# EAGLE board Legoduino2 (EAGLE 6.0), part 1 of 2
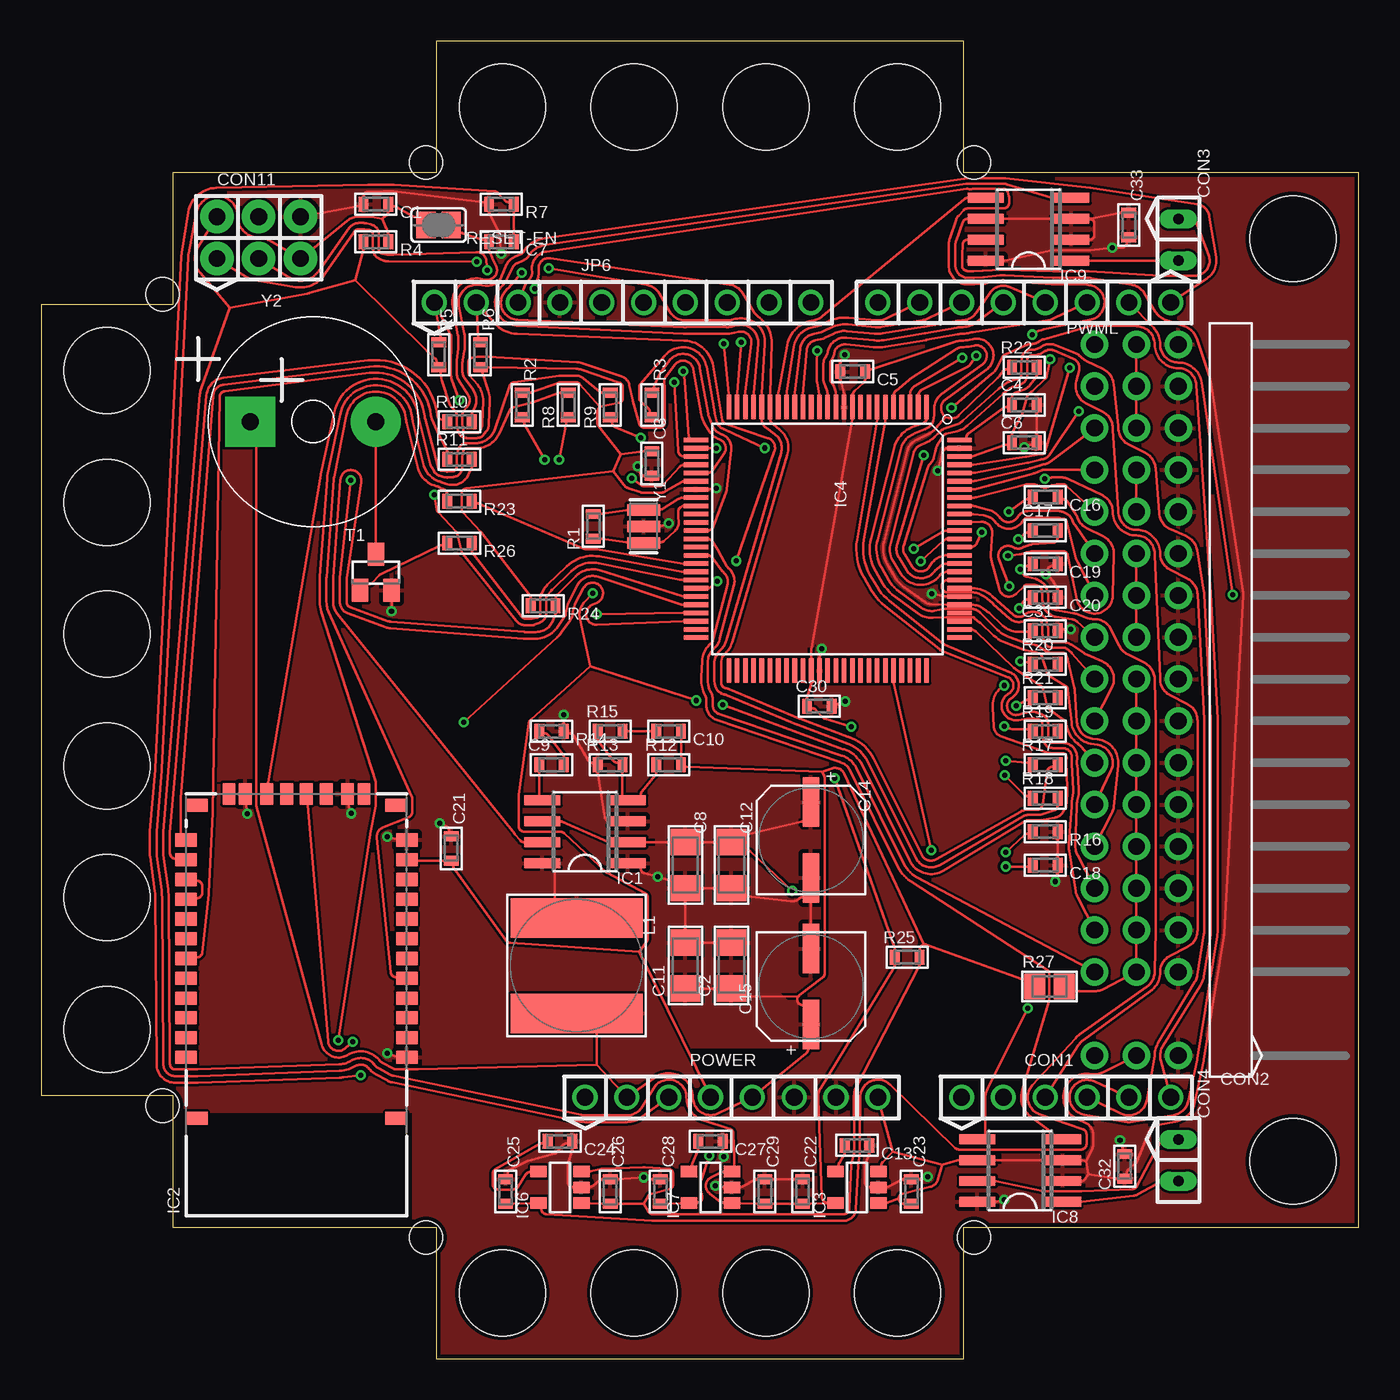
[diagram p0: board, top side]
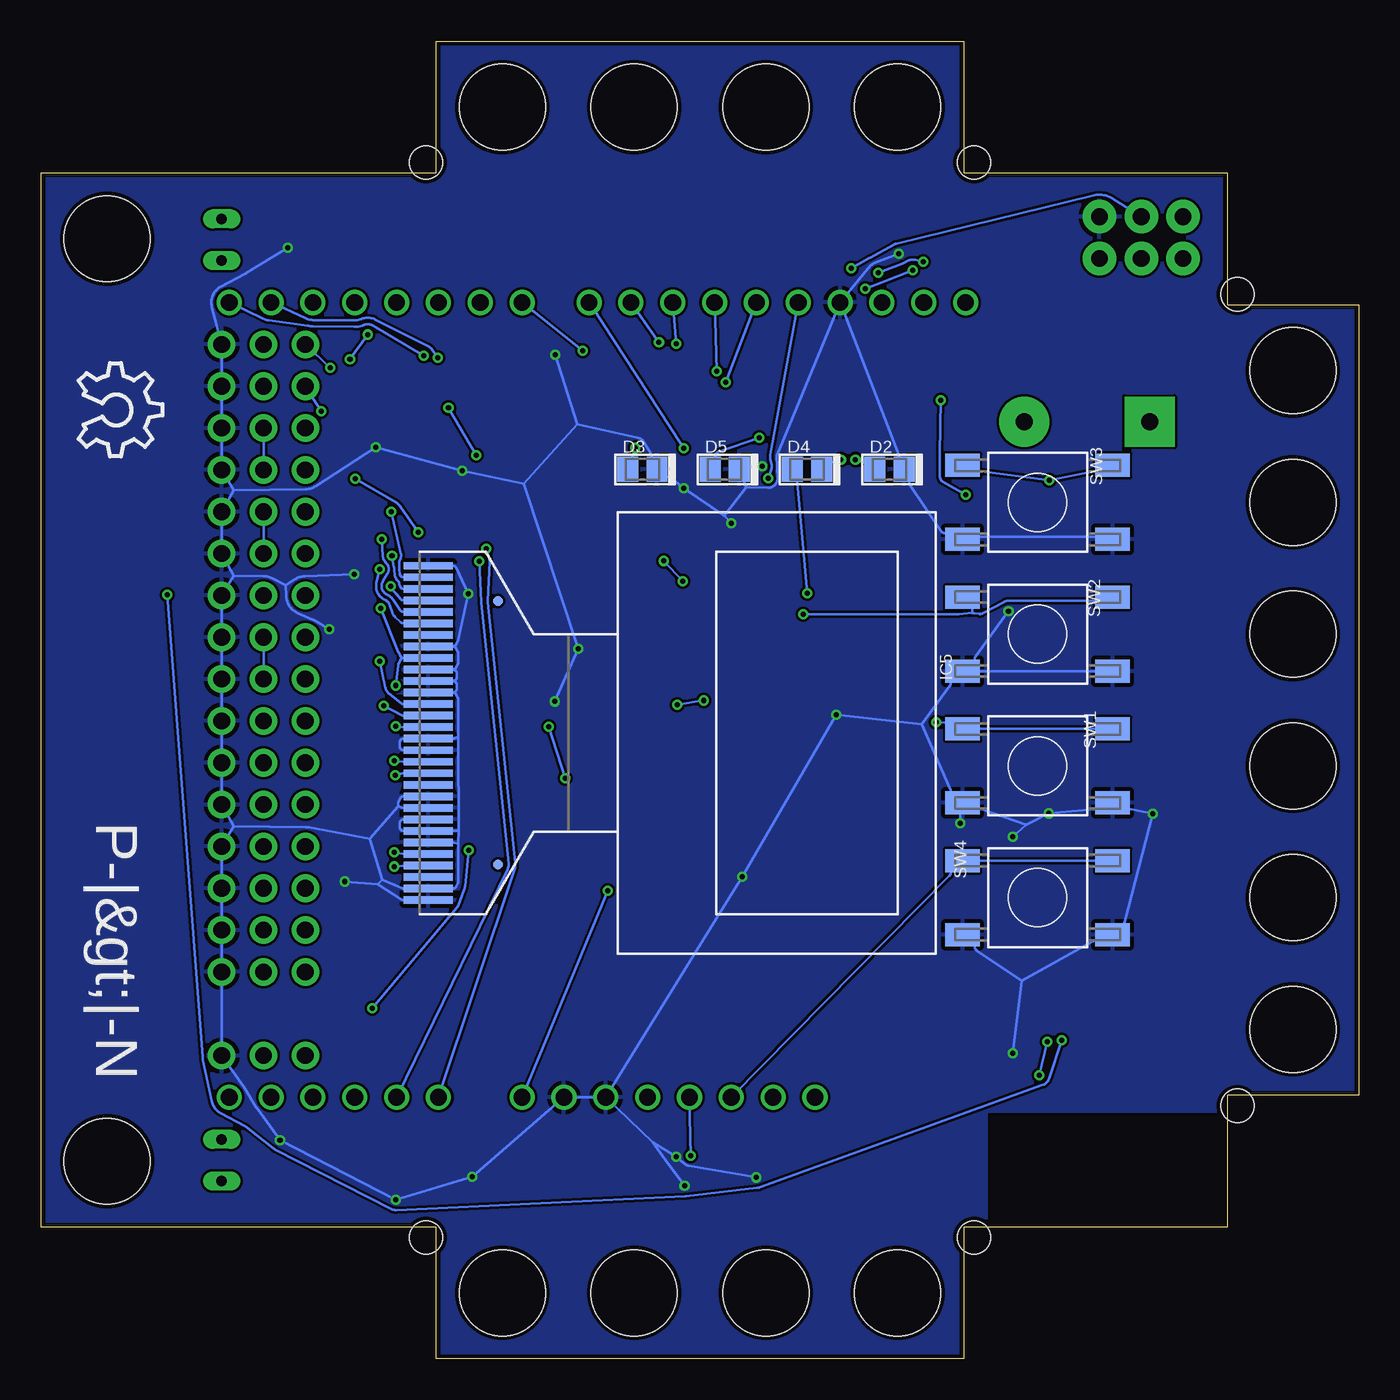
[diagram p1: board, bottom side, seen from below]

Size 80 x 80 mm. Coordinates in mm from the lower left corner, seen from the top.
Outline: 0,16 8,16 8,8 24,8 24,0 56,0 56,8 80,8 80,72 56,72 56,80 24,80 24,72 8,72 8,64 0,64 0,16
Copper layers 1+16: Top 0.035mm / dielectric 0.15mm / Bottom 0.035mm
Design rules: minimum track width 0.1524mm, track to track 0.1524mm, copper to edge 0.254mm, minimum pad ring 0.1mm, minimum via ring 0.1mm
Net classes: 0 default: width 0.152 mm, clearance 0.152 mm; 1 gnd: width 0.152 mm, clearance 0.152 mm to class 0, clearance 0.152 mm
Holes 2 mm at 7.37,64.64 23.36,72.64 56.63,72.64 56.63,7.37 23.36,7.37 7.37,15.37
Holes 5.2 mm at 28,4 36,4 44,4 52,4 4,20 4,28 4,36 4,44 4,52 4,60 28,76 36,76 44,76 52,76 76,68 76,12
tKeepout: area 24,0 to 56,8; area 24,72 to 56,80
bKeepout: area 24,72 to 56,80; area 24,0 to 56,8

## Footprints (pad centres in the part's own frame; a part is rotated, then mirrored left to right if it is on the bottom)
PN_default$ = smd 0.6 x 0.9: 1 -0.75,0; 2 0.75,0
PN_default$' = smd 1.6 x 1.8: 1 -1.4,0; 2 1.4,0
PN_default$'' = smd 3 x 1: + -2.3,0; - 2.3,0
pins$ = drill 1.016 pad 1.524: 1 -6.35,0; 2 -3.81,0; 3 -1.27,0; 4 1.27,0; 5 3.81,0; 6 6.35,0
PN_connector$ = drill 1.016 pad 1.676: 1 -21.59,-2.54; 2 -21.59,0; 3 -21.59,2.54; 4 -16.51,-2.54; 5 -16.51,0; 6 -16.51,2.54; 7 -13.97,-2.54; 8 -13.97,0; 9 -13.97,2.54; 10 -11.43,-2.54; 11 -11.43,0; 12 -11.43,2.54; 13 -8.89,-2.54; 14 -8.89,0; 15 -8.89,2.54; 16 -6.35,-2.54; 17 -6.35,0; 18 -6.35,2.54; 19 -3.81,-2.54; 20 -3.81,0; 21 -3.81,2.54; 22 -1.27,-2.54; 23 -1.27,0; 24 -1.27,2.54; 25 1.27,-2.54; 26 1.27,0; 27 1.27,2.54; 28 3.81,-2.54; 29 3.81,0; 30 3.81,2.54; 31 6.35,-2.54; 32 6.35,0; 33 6.35,2.54; 34 8.89,-2.54; 35 8.89,0; 36 8.89,2.54; 37 11.43,-2.54; 38 11.43,0; 39 11.43,2.54; 40 13.97,-2.54; 41 13.97,0; 42 13.97,2.54; 43 16.51,-2.54; 44 16.51,0; 45 16.51,2.54; 46 19.05,-2.54; 47 19.05,0; 48 19.05,2.54; 49 21.59,-2.54; 50 21.59,0; 51 21.59,2.54
pins$' = drill 0.635 pad 1.143 long: 1 -1.27,0; 2 1.27,0
Pietrucha$ = drill 1.016 pad 2.032: 1 -2.54,-1.27; 2 -2.54,1.27; 3 0,-1.27; 4 0,1.27; 5 2.54,-1.27; 6 2.54,1.27
PN_default$''' = smd 1.27 x 1.524: A -0.889,0; K 0.889,0
PN_IC$ = smd 0.6 x 2.2: 1 -1.905,-2.6; 2 -0.635,-2.6; 3 0.635,-2.6; 4 1.905,-2.6; 5 1.905,2.6; 6 0.635,2.6; 7 -0.635,2.6; 8 -1.905,2.6
PN_modules$ = smd 0.8 x 1.3: 1 -3.2,-6.7; 2 -2,-6.7; 3 -0.8,-6.7; 4 0.4,-6.7; 5 1.6,-6.7; 6 2.8,-6.7; 7 4,-6.7; 8 5.2,-6.7; 9 6.4,-6.7; 10 7.6,-6.7; 11 8.8,-6.7; 12 10,-6.7; 13 10,6.7; 14 8.8,6.7; 15 7.6,6.7; 16 6.4,6.7; 17 5.2,6.7; 18 4,6.7; 19 2.8,6.7; 20 1.6,6.7; 21 0.4,6.7; 22 -0.8,6.7; 23 -2,6.7; 24 -3.2,6.7; P$1 12.1,6.05; P$10 12.1,-6.05; P$35 -6.9,-6.05; P$36 -6.9,6.05 | smd 1.3 x 0.78: 28 12.8,3.1; 29 12.8,-3.1; 30 12.8,4.1; 35 12.8,-4.1 | smd 1.3 x 0.8: 31 12.8,1.8; 32 12.8,0.6; 33 12.8,-0.6; 34 12.8,-1.8
PN_IC$' = smd 0.7 x 1: 1 -0.95,-1.3; 2 0,-1.3; 3 0.95,-1.3; 4 0.95,1.3; 5 -0.95,1.3
PN_microcontrollers$ = smd 1.5 x 0.28: 1 -8,6; 2 -8,5.5; 3 -8,5; 4 -8,4.5; 5 -8,4; 6 -8,3.5; 7 -8,3; 8 -8,2.5; 9 -8,2; 10 -8,1.5; 11 -8,1; 12 -8,0.5; 13 -8,0; 14 -8,-0.5; 15 -8,-1; 16 -8,-1.5; 17 -8,-2; 18 -8,-2.5; 19 -8,-3; 20 -8,-3.5; 21 -8,-4; 22 -8,-4.5; 23 -8,-5; 24 -8,-5.5; 25 -8,-6; 51 8,-6; 52 8,-5.5; 53 8,-5; 54 8,-4.5; 55 8,-4; 56 8,-3.5; 57 8,-3; 58 8,-2.5; 59 8,-2; 60 8,-1.5; 61 8,-1; 62 8,-0.5; 63 8,0; 64 8,0.5; 65 8,1; 66 8,1.5; 67 8,2; 68 8,2.5; 69 8,3; 70 8,3.5; 71 8,4; 72 8,4.5; 73 8,5; 74 8,5.5; 75 8,6 | smd 0.28 x 1.5: 26 -6,-8; 27 -5.5,-8; 28 -5,-8; 29 -4.5,-8; 30 -4,-8; 31 -3.5,-8; 32 -3,-8; 33 -2.5,-8; 34 -2,-8; 35 -1.5,-8; 36 -1,-8; 37 -0.5,-8; 38 0,-8; 39 0.5,-8; 40 1,-8; 41 1.5,-8; 42 2,-8; 43 2.5,-8; 44 3,-8; 45 3.5,-8; 46 4,-8; 47 4.5,-8; 48 5,-8; 49 5.5,-8; 50 6,-8; 76 6,8; 77 5.5,8; 78 5,8; 79 4.5,8; 80 4,8; 81 3.5,8; 82 3,8; 83 2.5,8; 84 2,8; 85 1.5,8; 86 1,8; 87 0.5,8; 88 0,8; 89 -0.5,8; 90 -1,8; 91 -1.5,8; 92 -2,8; 93 -2.5,8; 94 -3,8; 95 -3.5,8; 96 -4,8; 97 -4.5,8; 98 -5,8; 99 -5.5,8; 100 -6,8
PN_opto$ = smd 0.45 x 3: 1 -10.15,-23; 2 -9.45,-23; 3 -8.75,-23; 4 -8.05,-23; 5 -7.35,-23; 6 -6.65,-23; 7 -5.95,-23; 8 -5.25,-23; 9 -4.55,-23; 10 -3.85,-23; 11 -3.15,-23; 12 -2.45,-23; 13 -1.75,-23; 14 -1.05,-23; 15 -0.35,-23; 16 0.35,-23; 17 1.05,-23; 18 1.75,-23; 19 2.45,-23; 20 3.15,-23; 21 3.85,-23; 22 4.55,-23; 23 5.25,-23; 24 5.95,-23; 25 6.65,-23; 26 7.35,-23; 27 8.05,-23; 28 8.75,-23; 29 9.45,-23; 30 10.15,-23 | smd 0.6 x 0.6: ALIGN1 -8,-18.75; ALIGN2 8,-18.75
pins$'' = drill 1.016 pad 1.524: 1 -11.43,0; 2 -8.89,0; 3 -6.35,0; 4 -3.81,0; 5 -1.27,0; 6 1.27,0; 7 3.81,0; 8 6.35,0; 9 8.89,0; 10 11.43,0
PN_inductor$ = smd 2.4 x 8: 1 -2.9,0; 2 2.9,0
pins$''' = drill 1.016 pad 1.524: 1 -8.89,0; 2 -6.35,0; 3 -3.81,0; 4 -1.27,0; 5 1.27,0; 6 3.81,0; 7 6.35,0; 8 8.89,0
PN_default$'''' = smd 1.27 x 1.524: 1 -0.889,0; 2 0.889,0
jumper$ = smd 1.168 x 1.6: 1 -0.762,0; 2 0.762,0
PN_default$''''' = smd 1.4 x 2.1: 1 -2.25,-4.55; 1A -2.25,4.55; 2 2.25,-4.55; 2A 2.25,4.55
PN_default$'''''' = smd 1 x 1.4: 1 -0.95,-1.1; 2 0.95,-1.1; 3 0,1.1
SmartPrj$ = smd 0.7 x 2: 1 -1,0; 2 0,0; 3 1,0
Pietrucha$' = drill 1.016 pad 3.048 square: + -3.81,0 | drill 1.016 pad 3.048: - 3.81,0

## Placement (x,y rotation side)
C1  22p  [PN_default$]  20.32,70.1 180 top
C2  22u  [PN_default$']  41.91,23.88 90 top
C3  100n  [PN_default$]  37.08,54.36 270 top
C4  100n  [PN_default$]  59.69,57.91 0 top
C5  100n  [PN_default$]  49.28,59.94 180 top
C6  100n  [PN_default$]  59.69,55.63 0 top
C7  100n  [PN_default$]  27.94,67.82 180 top
C8  22u  [PN_default$']  39.12,29.97 270 top
C9  3n9  [PN_default$]  30.99,36.07 0 top
C10  150p  [PN_default$]  38.1,38.1 180 top
C11  22u  [PN_default$']  39.12,23.88 90 top
C12  22u  [PN_default$']  41.91,29.97 270 top
C13  470p  [PN_default$]  49.53,12.95 180 top
C14  100u/25V  [PN_default$'']  46.74,31.5 270 top
C15  100u/25V  [PN_default$'']  46.74,22.61 90 top
C16  *  [PN_default$]  60.96,52.32 180 top
C17  *  [PN_default$]  60.96,50.29 0 top
C18  *  [PN_default$]  60.96,29.97 180 top
C19  *  [PN_default$]  60.96,48.26 180 top
C20  *  [PN_default$]  60.96,46.23 180 top
C21  100n  [PN_default$]  24.89,30.99 270 top
C22  2u2  [PN_default$]  46.23,10.16 270 top
C23  1u  [PN_default$]  52.83,10.16 270 top
C24  470p  [PN_default$]  31.5,13.21 180 top
C25  2u2  [PN_default$]  28.19,10.16 270 top
C26  1u  [PN_default$]  34.54,10.16 270 top
C27  470p  [PN_default$]  40.64,13.21 180 top
C28  2u2  [PN_default$]  37.59,10.16 270 top
C29  1u  [PN_default$]  43.94,10.16 270 top
C30  100n  [PN_default$]  47.24,39.62 0 top
C31  100n  [PN_default$]  60.96,44.2 0 top
C32  100n  [PN_default$]  65.79,11.68 90 top
C33  100n  [PN_default$]  66.04,68.83 270 top
CON1  [pins$]  62.23,15.88 0 top
CON2  [PN_connector$]  66.5,40 90 top
CON3  [pins$']  69.04,67.94 270 top
CON4  [pins$']  69.04,12.06 270 top
CON11  ISP-AVR  [Pietrucha$]  13.21,68.07 0 top
D2  PWR  [PN_default$''']  28.5,54 0 bottom
D3  LED  [PN_default$''']  43.5,54 0 bottom
D4  DATA  [PN_default$''']  33.5,54 0 bottom
D5  CONN  [PN_default$''']  38.5,54 0 bottom
IC1  NCP3170ADR2G  [PN_IC$]  33.02,32 90 top
IC2  RN-42  [PN_modules$]  15.5,21.5 90 top
IC3  MIC5205-5.0YM5  [PN_IC$']  49.53,10.41 90 top
IC4  ATMEGA2560-16AU  [PN_microcontrollers$]  47.75,49.78 270 top
IC5  UG-2864HSWEG01_SPI  [PN_opto$]  33.5,38 270 bottom
IC6  MIC5205-3.6YM5  [PN_IC$']  31.5,10.41 90 top
IC7  MIC5205-3.3YM5  [PN_IC$']  40.64,10.41 90 top
IC8  BD6221F-E2  [PN_IC$]  59.44,11.43 90 top
IC9  BD6221F-E2  [PN_IC$]  59.94,68.58 90 top
JP6  [pins$'']  35.31,64.14 0 top
L1  SRN8040-100M  [PN_inductor$]  32.51,23.88 270 top
LOGO1  [ohw-logo$]  77.72,60.45 270 bottom
POWER  [pins$''']  41.91,15.88 0 top
PWML  [pins$''']  59.69,64.14 180 top
R1  1M  [PN_default$]  33.53,50.55 90 top
R2  1k  [PN_default$]  29.21,57.91 270 top
R3  1k  [PN_default$]  37.08,57.91 270 top
R4  10k  [PN_default$]  20.32,67.82 180 top
R5  10k  [PN_default$]  24.13,60.96 270 top
R6  10k  [PN_default$]  26.67,60.96 270 top
R7  1k  [PN_default$]  27.94,70.1 180 top
R8  1k  [PN_default$]  32,57.91 90 top
R9  1k  [PN_default$]  34.54,57.91 90 top
R10  10k  [PN_default$]  25.4,56.9 0 top
R11  10k  [PN_default$]  25.4,54.61 0 top
R12  24k9  [PN_default$]  38.1,36.07 0 top
R13  4k75  [PN_default$]  34.54,36.07 0 top
R14  10k  [PN_default$]  30.99,38.1 180 top
R15  1k  [PN_default$]  34.54,38.1 0 top
R16  390k  [PN_default$]  60.96,32 180 top
R17  10k  [PN_default$]  60.96,36.07 0 top
R18  10k  [PN_default$]  60.96,34.04 0 top
R19  10k  [PN_default$]  60.96,38.1 0 top
R20  10k  [PN_default$]  60.96,42.16 0 top
R21  10k  [PN_default$]  60.96,40.13 0 top
R22  0R  [PN_default$]  59.69,60.2 0 top
R23  10k  [PN_default$]  25.4,52.07 180 top
R24  100k  [PN_default$]  30.48,45.72 180 top
R25  N.C.  [PN_default$]  52.58,24.38 0 top
R26  10k  [PN_default$]  25.4,49.53 180 top
R27  0R  [PN_default$'''']  61.21,22.61 0 top
RESET-EN  [jumper$]  24.13,68.83 180 top
SW1  [PN_default$''''']  19.5,36 270 bottom
SW2  [PN_default$''''']  19.5,44 270 bottom
SW3  [PN_default$''''']  19.5,52 270 bottom
SW4  RST  [PN_default$''''']  19.5,28 270 bottom
T1  [PN_default$'''''']  20.32,47.75 0 top
Y1  [SmartPrj$]  36.58,50.55 270 top
Y2  [Pietrucha$']  16.51,56.9 0 top

## Library data of the parts
C1 C3-C7 C9 C10 C13 C16-C33 R1-R26 = $0603
C2 C8 C11 C12 = $1206
C14 C15 = $CE_SMD6.3
CON1 = $PIN6X1C
CON2 = $PIN(1+16)X3_DS
CON3 CON4 = $PIN2X1B
CON11 = $PIN3X2
D2-D5 = $D0805
IC1 IC8 IC9 = $SO08
IC2 = $RN42
IC3 IC6 IC7 = $SOT23-5
IC4 = $TQFP100
IC5 = $UG-2864HSWEG01
JP6 = $PIN10X1C
L1 = $SRN8040
LOGO1 = $OSHW_10X200_NOTEXT
POWER PWML = $PIN8X1C
R27 = $0805
RESET-EN = $SJ
SW1-SW4 = $MICROSW_SMD
T1 = $SOT23
Y1 = $RESONATOR
Y2 = $BUZZER-HCM

## Nets
0: IC4.2 PWML.1 R10.2
1: IC4.3 PWML.2 R11.2
2: IC4.12 PWML.3
3: IC4.16 PWML.4
4: IC4.13 PWML.5
5: IC4.17 PWML.6
6: IC4.18 PWML.7
7: IC4.14 PWML.8
8: IC4.27 JP6.10
9: IC4.24 JP6.9
10: IC4.25 JP6.8
11: IC4.26 JP6.7
12: IC4.28 JP6.6
13: IC4.29 JP6.5
18: IC4.46 SW3.1 SW3.1A
19: IC1.7 IC4.45 R24.1
20: IC4.44 JP6.2 R6.1
21: IC4.43 JP6.1 R5.1
22: IC4.78
23: CON2.21 IC4.77
24: CON2.18 IC4.1
25: CON2.15 IC4.5
26: CON2.12 IC4.6
27: CON2.9 IC4.7
28: CON2.6 IC4.38
29: IC4.71 IC8.5
38: IC4.37 R3.1
42: IC4.42 R26.1
43: IC4.41 R23.1
44: IC4.40 IC8.4
46: IC4.23 IC9.4
50: CON11.1 IC4.22
51: CON11.4 IC4.21 R18.2
52: CON11.3 IC4.20 R17.2
70: R19.2
71: IC4.19 IC9.5
72: R20.2
73: R21.2
74: IC4.47 SW2.1 SW2.1A
75: IC4.48 SW1.1 SW1.1A
+3V3: C20.2 C21.2 C28.2 D4.A IC2.11 IC5.9 IC7.5 POWER.4
+3V6: C19.2 C25.2 IC5.6 IC6.5
+5V: C3.1 C5.1 C22.2 C29.2 C30.1 C31.1 CON11.2 IC3.5 IC4.10 IC4.31 IC4.61 IC4.80 IC7.1 IC7.3 R2.1 R4.2 R5.2 R6.2 R22.1 R24.2 R25.1
+5VP: C2.1 C10.1 C11.1 C15.+ C26.2 IC6.1 IC6.3 L1.2 POWER.2 POWER.5 R12.2 R25.2 R27.1 Y2.+
+5VP_O: CON2.5 CON2.8 CON2.11 CON2.14 CON2.17 CON2.20 CON2.23 CON2.26 CON2.29 CON2.32 CON2.35 CON2.38 CON2.41 CON2.44 CON2.47 CON2.50 R27.2
ADC0: CON1.1 IC4.89
ADC1: CON1.2 IC4.88
ADC2: CON1.3 IC4.87
ADC3: CON1.4 IC4.86
ADC4: CON1.5 IC4.85
ADC5: CON1.6 IC4.84
ADC6: CON2.27 IC4.83
ADC7: CON2.24 IC4.82
ADC8: CON2.51 IC4.97
ADC9: CON2.48 IC4.96
ADC10: CON2.45 IC4.95
ADC11: CON2.42 IC4.94
ADC12: CON2.39 IC4.93
ADC13: CON2.36 IC4.92
ADC14: CON2.33 IC4.91
ADC15: CON2.30 IC4.90
AREF: C6.1 IC4.98 JP6.3
AVCC: C4.1 IC4.100 R22.2
DTR: C7.1 IC2.33 R7.1
GND [gnd]: C1.2 C2.2 C3.2 C4.2 C5.2 C6.2 C8.2 C11.2 C12.2 C13.1 C14.- C15.- C18.1 C19.1 C20.1 C21.1 C22.1 C23.1 C24.1 C25.1 C26.1 C27.1 C28.1 C29.1 C30.2 C31.2 C32.2 C33.2 CON2.1 CON2.4 CON2.7 CON2.10 CON2.13 CON2.16 CON2.19 CON2.22 CON2.25 CON2.28 CON2.31 CON2.34 CON2.37 CON2.40 CON2.43 CON2.46 CON2.49 CON11.6 D2.K D3.K D5.K IC1.1 IC1.3 IC2.1 IC2.12 IC2.28 IC2.29 IC3.2 IC4.11 IC4.32 IC4.62 IC4.81 IC4.99 IC5.1 IC5.8 IC5.10 IC5.11 IC5.12 IC5.16 IC5.17 IC5.21 IC5.22 IC5.23 IC5.24 IC5.25 IC5.29 IC5.30 IC6.2 IC7.2 IC8.8 IC9.8 JP6.4 POWER.6 POWER.7 R7.2 R13.1 R14.1 R16.1 SW1.2 SW1.2A SW2.2 SW2.2A SW3.2 SW3.2A SW4.2 SW4.2A T1.2 Y1.2
GND1: IC1.4 R12.1 R13.2 R15.1
N$1: IC2.14 R10.1
N$2: D3.A R3.2
N$3: D2.A R2.2
N$4: IC2.13 R11.1
N$5: IC2.31 R8.2
N$6: D4.K R8.1
N$7: D5.A R9.1
N$8: IC2.19 R9.2
N$9: C18.2 IC5.27
N$10: C9.1 IC1.5
N$11: C9.2 R14.2
N$12: IC5.26 R16.2
N$13: C10.2 R15.2
N$14: C16.1 IC5.3
N$15: C17.2 IC5.4
N$16: C16.2 IC5.2
N$17: C17.1 IC5.5
N$18: IC5.13 R20.1
N$19: IC5.15 R19.1
N$20: IC5.18 R17.1
N$21: IC5.19 R18.1
N$22: IC2.15 IC2.16
N$23: IC5.14 R21.1
N$24: C13.2 IC3.4
N$25: T1.3 Y2.-
N$26: R26.2 T1.1
N$27: IC2.5 R23.2
N$28: C24.2 IC6.4
N$29: CON3.2 IC9.1
N$30: CON4.2 IC8.1
N$31: C27.2 IC7.4
N$32: CON3.1 IC9.7
N$33: CON4.1 IC8.7
OC_PWM1: IC4.15
OC_PWM2: IC4.39
RESET: C1.1 C7.2 CON11.5 IC4.30 POWER.3 R4.1 RESET-EN.1 RESET-EN.2 SW4.1 SW4.1A
SW: IC1.8 L1.1
VCC: IC5.28
VIN: C8.1 C12.1 C14.+ C23.2 C32.1 C33.1 CON2.2 IC1.2 IC1.6 IC3.1 IC3.3 IC8.2 IC8.3 IC8.6 IC9.2 IC9.3 IC9.6 POWER.8
XTAL1: IC4.34 R1.1 Y1.3
XTAL2: IC4.33 R1.2 Y1.1

## Tracks (layer width: path | path; a pad name or v marks a point on that pad's centre or on a via)
0  (via drill 0.3 pad 0.61)
  Top 0.152: IC4.2 53.25,58.46 53.25,58.53 arc-30 53.27,58.6 53.33,58.7 arc-33 53.46,58.83 56.21,60.21 arc28 56.44,60.41 v56.78,60.9 | R10.2 26.15,57.27 26.15,57.35 arc-26 26.18,57.48 26.32,57.75 arc62 26.22,58.83 25.7,59.53 arc-36 25.58,59.91 25.58,60.51 arc-11 25.59,60.63 25.7,61.2 arc10 25.72,61.39 25.72,61.69 arc1 25.72,61.71 25.72,62.01 arc11 25.7,62.23 25.36,63.92 arc-107 26.52,65.2 27,65.16 arc74 27.97,65.75 28.2,66.33 arc-45 28.75,66.9 29.12,67.07 arc34 29.27,67.19 29.27,67.2 arc-49 30.57,68.03 56.03,71.65 arc-8 56.24,71.67 58.44,71.67 arc-6 58.54,71.66 63.68,71.11 arc-3 63.7,71.11 70.18,70.1 arc-72 70.93,69.35 71.33,66.88 arc-66 70.76,65.58 PWML.1
  Bottom 0.152: v56.78,60.9 59.85,62.73 arc-53 60.4,62.77 60.41,62.77 arc23 60.98,62.66 63.52,62.69 arc9 63.75,62.71 63.76,62.71 arc-2 63.8,62.72 66.19,63.05 arc18 66.51,63.15 PWML.1
1  (via drill 0.3 pad 0.61)
  Top 0.152: v72.35,46.38 70.46,59.26 arc82 69.04,60.49 arc-90 67.94,61.59 arc44 67.53,62.59 PWML.2 | IC4.3 52.75,58.46 52.75,58.53 arc-59 53.06,59.08 v55.92,60.78 | R11.2 26.15,54.24 26.15,54.16 arc-26 26.12,54.03 25.94,53.67 arc-84 24.57,53.12 24.3,53.22 arc-4 24.23,53.25 arc9 24.11,53.3 arc-26 23.75,53.49 23.58,53.64 arc-34 23.24,54.21 22.57,56.9 arc-7 22.52,57.13 22.52,57.15 arc162 18.15,57.34 17.38,53.62 arc7 17.36,53.44 16.92,47.49 arc4 16.91,47.35 16.91,45.95 arc18 17.01,45.36 20.3,35.05 arc-18 20.32,34.95 20.32,33.65 arc-11 20.31,33.59 19.99,31.89 arc2 19.98,31.85 v18.05,19.33
  Bottom 0.152: v18.05,19.33 18.8,17.03 arc52 19.18,16.63 36.37,10.41 arc13 36.52,10.38 40.87,9.87 arc4 40.91,9.87 58.45,9.04 arc30 58.77,9.11 65.79,12.71 arc11 65.9,12.77 67.48,14.04 arc-11 67.62,14.13 69.09,14.91 arc50 69.65,15.65 70.18,18.17 arc8 70.2,18.32 v72.35,46.38 | v55.92,60.78 56.26,61.27 arc-28 56.49,61.47 59.71,63.1 arc-49 60.55,63.13 60.56,63.13 arc22 60.97,63.05 63.51,63.07 arc24 63.95,63.17 PWML.2
2
  Top 0.152: IC4.12 48.25,58.46 48.25,58.53 arc39 48,59.25 47.97,59.29 arc-39 47.9,59.49 47.9,59.88 | 47.9,59.88 | 47.9,59.88 47.9,60.39 arc-33 47.95,60.57 48,60.65 arc21 48.14,61 48.16,61.09 arc-84 48.84,61.59 50.54,61.43 arc15 51.23,61.45 53.71,61.85 arc1 53.75,61.86 55.66,62.2 arc-7 55.85,62.23 55.98,62.23 arc10 56.29,62.27 56.47,62.31 arc-3 56.55,62.33 61.13,63.06 arc16 61.43,63.15 PWML.3
3
  Top 0.152: IC4.16 46.25,58.46 46.25,58.53 arc-5 46.25,58.55 46.49,61.27 arc-75 47.01,61.84 47.15,61.86 arc17 47.8,62.08 48.12,62.25 arc-33 48.92,62.4 50.62,62.24 arc15 51.1,62.26 53.58,62.66 arc1 53.61,62.66 55.52,63.01 arc-7 55.81,63.04 55.94,63.04 arc53 56.78,63.52 57.58,64.7 arc-79 58.82,65.06 PWML.4
4
  Top 0.152: IC4.13 47.75,58.46 47.75,58.53 arc20 47.71,58.75 47.53,59.24 arc-20 47.49,59.49 47.49,59.88 47.49,60.39 arc-33 47.61,60.79 47.65,60.87 arc21 47.74,61.08 47.76,61.17 arc-84 48.88,62 50.58,61.83 arc15 51.17,61.85 53.65,62.26 arc1 53.68,62.26 55.59,62.6 arc-7 55.83,62.63 55.95,62.64 arc33 56.76,62.92 PWML.5
5
  Top 0.152: IC4.17 45.75,58.46 45.75,58.53 arc-7 45.76,58.61 46.09,61.34 arc-73 46.93,62.23 47.08,62.26 arc17 47.61,62.44 47.93,62.61 arc-33 48.96,62.81 50.66,62.64 arc15 51.04,62.66 53.52,63.06 arc16 53.81,63.15 PWML.6
6
  Top 0.152: IC4.18 45.25,58.46 45.25,58.53 arc-9 45.27,58.71 45.69,61.43 arc-71 46.86,62.63 47.01,62.66 arc17 47.42,62.8 47.74,62.97 arc-33 48.99,63.21 50.7,63.05 arc31 51.27,63.15 PWML.7
7  (via drill 0.3 pad 0.61)
  Top 0.152: IC4.14 47.25,58.46 47.25,58.53 arc11 47.25,58.56 47.11,59.27 arc-11 47.09,59.49 47.08,59.88 47.08,60.39 arc-3 47.08,60.45 v47.12,61.21
  Bottom 0.152: v47.12,61.21 PWML.8
8  (via drill 0.3 pad 0.61)
  Top 0.152: IC4.27 40.43,55.28 40.5,55.28 v40.99,55.29
  Bottom 0.152: v40.99,55.29 JP6.10
9  (via drill 0.3 pad 0.61)
  Top 0.152: IC4.24 42.25,58.46 42.25,58.53 arc-4 42.26,58.62 v42.49,61.73
  Bottom 0.152: v42.49,61.73 JP6.9
10  (via drill 0.3 pad 0.61)
  Top 0.152: IC4.25 41.75,58.46 41.75,58.53 arc6 41.75,58.55 v41.43,61.62
  Bottom 0.152: v41.43,61.62 JP6.8
11  (via drill 0.3 pad 0.61)
  Top 0.152: IC4.26 39.33,55.85 39.33,55.92 arc4 39.33,55.95 39.08,59.33 arc6 39.08,59.39 v38.97,59.97
  Bottom 0.152: v38.97,59.97 JP6.7
12  (via drill 0.3 pad 0.61)
  Top 0.152: IC4.28 39.08,54.78 39,54.78 arc-30 38.93,54.8 38.84,54.86 arc-57 38.67,55.13 v38.45,59.28
  Bottom 0.152: v38.45,59.28 JP6.6
13  (via drill 0.3 pad 0.61)
  Top 0.152: IC4.29 39.08,54.28 39,54.28 arc30 38.93,54.27 38.84,54.21 arc17 38.76,54.15 37.78,53.08 arc-47 37.53,52.98 36.63,52.98 arc-36 36.44,53.04 v35.86,53.46
  Bottom 0.152: v35.86,53.46 35.67,53.99 arc-30 35.65,54.29 35.72,54.63 arc21 35.72,54.89 JP6.5
18  (via drill 0.3 pad 0.61)
  Top 0.152: IC4.46 39.08,45.78 39,45.78 arc-18 38.8,45.82 33.81,47.48 arc81 32.56,46.98 32.08,46.06 arc21 31.88,45.4 31.86,45.23 arc-29 31.8,45.08 31.29,44.37 arc-54 30.03,43.72 29.43,43.72 arc-4 29.31,43.73 21.19,44.35 arc-16 20.91,44.41 18.61,45.26 arc-70 18.13,45.95 18.13,47.35 arc-6 18.14,47.43 v18.8,53.33
  Bottom 0.152: SW3.1 23.08,53.88 23,53.88 arc7 22.96,53.88 v18.8,53.33 16.06,53.87 arc11 16,53.88 15.92,53.88 SW3.1A
19
  Top 0.152: IC4.45 39.08,46.28 39,46.28 arc-17 38.96,46.29 33.91,47.87 arc62 32.46,47.52 31.32,46.38 arc45 31.23,46.17 31.23,46.09 R24.1 31.23,45.35 31.23,45.27 arc-21 31.21,45.16 31.1,44.87 arc-69 30.03,44.13 29.43,44.13 arc-4 29.34,44.13 21.22,44.76 arc-16 21.05,44.79 18.76,45.64 arc-70 18.54,45.95 18.54,47.35 arc-9 18.54,47.4 19.43,53.23 arc184 18.17,53.38 17.73,47.44 arc4 17.73,47.35 17.73,45.95 arc39 17.98,45.23 28.75,31.88 arc2 28.76,31.86 29.09,31.47 arc49 29.32,31.37 29.4,31.37 IC1.7
20  (via drill 0.3 pad 0.61)
  Top 0.152: v42.19,48.44 44.52,55.09 arc91 44.12,55.9 41.53,56.78 arc-62 41.35,56.99 40.8,60.28 arc78 39.04,61.82 28.88,62.23 arc-46 27.53,62.88 JP6.2 26.55,62.03 arc-4 26.55,62.01 26.55,61.93 R6.1 | IC4.44 40.43,46.78 40.5,46.78 arc30 40.57,46.8 40.67,46.86 arc13 40.73,46.9 v41.06,47.21
  Bottom 0.152: v41.06,47.21 v42.19,48.44
21  (via drill 0.3 pad 0.61)
  Top 0.152: v25.38,58.21 24.94,59.46 arc-19 24.86,59.91 24.86,60.51 arc-3 24.86,60.58 24.91,61.39 arc3 24.91,61.41 24.91,61.71 24.91,62.01 arc27 24.88,62.16 JP6.1 24.25,62.01 24.25,61.93 R5.1 | IC4.43 39.08,47.28 39,47.28 arc-11 38.77,47.31 33.85,48.31 arc55 32.2,47.83 31.02,46.7 arc7 30.96,46.64 30.72,46.34 arc40 30.66,46.17 30.66,45.27 arc-68 30.26,44.69 30,44.59 arc-22 29.73,44.53 29.43,44.53 arc-51 28.86,44.81 25.59,48.87 arc-25 25.53,49 25.27,50.06 arc29 25.19,50.2 24.11,51.4 arc-32 24.02,51.56 v23.87,52.45
  Bottom 0.152: v23.87,52.45 25.27,53.27 arc60 25.43,53.55 25.43,54.95 v25.38,58.21
23
  Top 0.152: CON2.21 63.14,37.15 arc12 62.92,37.36 62.91,37.37 arc-47 62.25,38.57 arc49 62.15,38.75 61.22,39.42 arc-40 61.1,39.6 60.83,40.66 arc43 60.69,40.86 59.75,41.46 arc-2 59.74,41.47 59.17,41.87 arc2 59.13,41.89 | 59.13,41.89 | 59.13,41.89 arc-11 59.05,41.96 56.73,44.16 arc13 56.67,44.21 56.57,44.27 arc30 56.5,44.28 56.43,44.28 IC4.77
24
  Top 0.152: CON2.18 64.95,35.71 arc105 64.16,37.27 63.71,37.35 arc-74 62.57,38.6 | 62.57,38.6 | 62.57,38.6 arc1 62.57,38.61 62.34,40.62 arc52 62.18,40.87 61.24,41.43 arc-41 61.1,41.61 60.74,42.69 arc55 60.58,42.85 60.3,42.93 arc7 60.27,42.94 59.79,43.02 arc-11 59.65,43.06 58.57,43.47 arc-22 57.84,43.91 57,44.69 arc2 56.98,44.7 56.66,44.97 arc41 56.5,45.03 55,45.03 arc3 54.99,45.03 54.13,44.99 arc-39 53.21,45.27 51.84,46.26 arc-24 51.11,47.07 50.67,47.82 arc-45 50.39,49.83 51.78,55.31 arc-58 53.02,56.62 53.48,56.76 arc23 53.58,56.82 53.7,56.93 arc49 53.75,57.03 53.75,57.11 IC4.1
25
  Top 0.152: CON2.15 65,33.11 arc21 65.12,33.52 65.39,36.04 arc89 64.14,37.62 63.82,37.66 arc-79 62.88,38.66 62.74,40.63 arc9 62.73,40.75 62.33,42.44 arc6 62.32,42.47 62.24,42.7 arc70 62.01,42.86 61.76,42.86 61.71,42.86 arc-1 61.7,42.86 61.4,42.86 arc-38 60.86,43.05 | 60.86,43.05 | 60.86,43.05 arc3 60.84,43.07 60.64,43.22 arc26 60.33,43.34 59.85,43.42 arc-11 59.79,43.44 58.71,43.85 arc-24 58.06,44.27 57.02,45.3 arc20 56.82,45.45 56.76,45.48 arc25 56.5,45.53 56.25,45.54 arc7 56.24,45.54 56.18,45.53 arc-6 56.17,45.53 55.33,45.53 arc-6 55.32,45.53 55.27,45.54 arc7 55.25,45.54 55.01,45.53 55,45.53 arc10 54.9,45.53 54.23,45.41 arc-46 53.45,45.6 52.08,46.59 arc-24 51.46,47.28 51.02,48.03 arc-45 50.78,49.73 52.18,55.21 arc-54 53.05,56.2 53.63,56.42 arc7 53.71,56.46 53.88,56.55 arc51 54.15,56.94 54.22,57.31 arc9 54.22,57.36 54.23,57.75 arc-53 54.66,58.57 57.15,60.39 arc156 56.64,61.52 56.46,61.48 arc-10 56.02,61.42 55.89,61.41 arc30 55.57,61.31 52.77,59.49 arc6 52.67,59.42 51.9,58.79 arc20 51.83,58.7 51.77,58.6 arc30 51.75,58.53 51.75,58.46 IC4.5
26
  Top 0.152: CON2.12 62.92,30.57 arc-30 62.79,31.15 62.88,33.53 arc2 62.88,33.59 arc1 62.88,33.61 62.88,33.62 arc-13 62.9,33.87 62.99,34.28 arc15 63.01,34.55 62.94,35.67 arc5 62.93,35.75 62.89,36.04 arc-11 62.88,36.25 62.9,36.47 arc93 62.01,37.41 61.76,37.41 61.71,37.41 61.66,37.41 61.41,37.41 61.41,37.41 arc-83 61.17,37.62 61.14,37.87 arc-8 61.13,37.91 61.13,37.97 arc1 61.13,37.98 61.13,38.22 arc1 61.13,38.23 61.13,38.29 61.13,38.3 61.13,38.55 arc68 60.74,39.13 60.48,39.23 arc30 60.1,39.28 59.81,39.24 arc7 59.72,39.22 59.34,39.11 arc-164 58.9,40.11 58.95,40.14 arc125 58.82,41.69 54.87,43.34 arc-16 54.8,43.39 51.49,46.02 arc-21 50.76,46.87 50.32,47.62 arc-41 49.95,49.71 51.24,56.92 arc10 51.25,57.03 51.25,57.11 IC4.6
27
  Top 0.152: CON2.9 62.92,28.03 arc-18 62.81,28.38 62.41,30.86 arc-14 62.39,31.23 62.56,33.54 arc6 62.57,33.6 62.57,33.61 arc-8 62.58,33.82 62.65,34.41 arc9 62.65,34.51 62.61,35.64 arc3 62.6,35.67 62.57,36.07 arc-7 62.57,36.24 62.58,36.5 arc92 62.01,37.08 61.76,37.08 61.75,37.08 61.72,37.08 arc1 61.7,37.08 61.67,37.08 61.66,37.08 61.41,37.08 61.41,37.08 arc-76 60.86,37.51 60.8,37.75 arc-16 60.78,37.93 60.78,37.97 60.78,37.98 60.78,38.22 60.78,38.23 60.78,38.27 arc-2 60.78,38.3 60.78,38.55 arc80 60.56,38.82 60.27,38.87 arc15 60.19,38.88 59.89,38.86 arc4 59.87,38.85 59.32,38.77 arc-155 58.71,40.37 58.78,40.42 arc125 58.68,41.39 54.73,42.96 arc-17 54.54,43.07 51.24,45.7 arc-21 50.41,46.66 49.97,47.41 arc-40 49.54,49.74 50.75,57.01 arc9 50.75,57.03 50.75,57.11 IC4.7
28
  Top 0.152: CON2.6 53.16,29.24 arc-36 52.37,30.06 49.48,35.89 arc46 48.62,36.62 48.62,36.62 arc-1 48.59,36.63 41.19,39.13 arc-80 40.77,39.81 arc36 40.67,40.44 40.63,40.52 arc-20 40.51,40.88 40.48,41.13 arc-8 40.47,41.29 40.47,42.28 arc-48 40.84,43.12 40.91,43.19 arc13 41.01,43.3 41.07,43.39 arc16 41.16,43.56 41.2,43.69 arc4 41.21,43.74 42.06,46.95 arc62 41.76,47.97 | 41.76,47.97 | 41.76,47.97 arc-18 41.64,48.13 41.14,49.01 arc2 41.13,49.03 40.78,49.6 arc28 40.67,49.71 40.57,49.77 arc30 40.5,49.78 40.43,49.78 IC4.38
29  (via drill 0.3 pad 0.61)
  Top 0.152: v54.03,30.88 51.76,41 arc-13 51.75,41.03 51.75,41.11 IC4.71 | IC8.5 57.33,13.56 57.33,13.63 57.33,15.88 arc-27 57.44,16.36 v59.9,21.29
  Bottom 0.152: v59.9,21.29 54.75,27.41 arc-19 54.69,27.51 54.31,28.52 arc-14 54.27,28.7 v54.03,30.88
38
  Top 0.152: IC4.37 40.43,50.28 40.5,50.28 arc30 40.57,50.3 40.67,50.36 arc40 40.81,50.53 41.59,52.64 arc14 41.62,52.79 41.9,55.19 arc77 41.3,56.15 41.3,56.15 arc-49 40.74,56.69 40.55,57.15 arc-12 40.49,57.38 39.99,60.15 arc133 38.14,60.6 37.62,59.91 arc13 37.5,59.7 37.23,59.09 arc24 37.2,58.96 37.2,58.89 R3.1
42
  Top 0.152: R26.1 26.15,49.16 26.15,49.08 arc38 26.21,48.9 29.17,45.07 arc52 29.43,44.94 29.73,44.94 arc11 29.79,44.95 30.08,45 arc79 30.3,45.27 30.3,46.17 arc-30 30.39,46.49 30.54,46.75 arc-16 30.74,46.99 31.92,48.12 arc-54 33.89,48.71 38.89,47.79 arc10 39,47.78 39.08,47.78 IC4.42
43
  Top 0.152: R23.1 26.37,51.95 26.45,51.95 arc-23 26.58,51.92 32.95,49.19 arc22 33.07,49.17 33.53,49.16 arc-8 33.91,49.12 38.98,48.29 arc9 39,48.28 39.08,48.28 IC4.41
44
  Top 0.152: IC8.4 61.27,13.56 61.27,13.63 arc53 61.14,13.9 60.07,14.71 arc-69 59.56,16.3 61.2,21.77 arc17 61.21,21.84 61.21,23.37 arc57 61.1,23.58 52.8,28.98 arc-31 52,29.88 49.12,35.71 arc46 48.5,36.23 48.5,36.23 arc-1 48.46,36.25 41.06,38.76 arc-80 40.38,39.88 arc37 40.32,40.27 40.29,40.32 arc-18 40.13,40.76 40.09,41.01 arc-14 40.06,41.38 40.12,42.37 arc-47 40.67,43.44 arc34 40.76,43.57 40.8,43.7 40.8,43.71 41.67,47.05 arc62 41.49,47.68 | 41.49,47.68 | 41.49,47.68 arc-11 41.35,47.82 40.77,48.62 arc23 40.67,48.71 40.57,48.77 arc30 40.5,48.78 40.43,48.78 IC4.40
46
  Top 0.152: IC9.4 61.52,70.48 61.44,70.48 arc-17 61.36,70.5 58.61,71.33 arc18 58.43,71.35 58.3,71.35 arc-3 58.26,71.35 58.13,71.35 arc1 58.11,71.35 56.57,71.35 arc1 56.56,71.35 56.43,71.35 arc-3 56.39,71.35 56.26,71.35 arc10 56.16,71.34 30.62,67.63 arc49 29.61,66.98 29.61,66.97 arc-34 29.29,66.7 28.91,66.53 arc41 28.6,66.22 28.27,65.54 arc-21 27.99,65.16 27.98,65.15 arc133 28.89,62.73 39.02,62.23 arc3 39.13,62.23 41.42,62.25 arc-5 41.48,62.25 41.5,62.25 arc17 42.07,62.29 42.35,62.35 arc-109 43.12,61.65 42.76,58.67 arc7 42.75,58.53 42.75,58.46 IC4.23
50  (via drill 0.3 pad 0.61)
  Top 0.152: v26.44,66.6 21.07,66.63 arc-21 20.8,66.68 20.54,66.79 arc-68 20.14,67.37 20.14,68.27 arc84 19.9,68.54 19.61,68.57 arc6 19.57,68.58 19.27,68.58 arc55 19.02,68.44 17.19,65.8 arc-65 15.47,65.07 12.99,65.47 arc-23 12.49,65.66 CON11.1 | IC4.22 43.25,58.46 43.25,58.53 arc-5 43.26,58.64 43.53,61.64 arc108 42.25,62.74 42,62.68 arc-18 41.52,62.65 | 41.52,62.65 | 41.52,62.65 arc6 41.42,62.65 39.13,62.64 arc-3 39.05,62.64 28.91,63.09 arc-134 28.23,64.89 28.24,64.9 arc5 28.34,65 v29.17,65.95
  Bottom 0.152: v29.17,65.95 27.72,66.5 arc-7 27.65,66.53 27.38,66.66 arc41 26.95,66.72 v26.44,66.6
51  (via drill 0.3 pad 0.61)
  Top 0.152: R18.2 61.71,33.66 61.71,33.59 arc-73 61.5,33.3 60.68,33.05 arc-17 60.51,33.02 59.91,33.02 arc30 59.62,32.94 54.55,29.98 arc-94 53.1,30.42 50.2,36.25 arc46 48.87,37.38 48.87,37.38 arc-3 48.82,37.4 45.94,38.48 arc-2 45.91,38.49 41.63,40.29 arc13 41.5,40.33 41.49,40.33 arc-74 40.91,40.96 40.88,41.21 arc-6 40.88,41.29 40.88,42.28 arc-29 40.97,42.64 41.08,42.83 arc-19 41.2,42.99 41.21,42.99 arc11 41.35,43.15 41.42,43.24 arc21 41.6,43.6 44.92,55.01 arc70 44.53,56.14 44.02,56.52 arc-54 43.75,57.03 43.75,57.11 IC4.21 43.75,58.46 43.75,58.53 arc-3 43.75,58.6 43.94,61.64 arc108 42.13,63.13 41.92,63.08 arc-19 41.56,63.05 41.55,63.05 arc5 41.42,63.06 39.12,63.04 arc-60 38.18,63.58 37.52,64.69 arc50 36.76,65.21 v30.83,66.2
  Bottom 0.152: v30.83,66.2 29.69,66.85 arc1 29.67,66.86 28.25,67.65 arc15 28.09,67.71 16.07,70.65 arc46 15.03,70.48 CON11.4
52  (via drill 0.3 pad 0.61)
  Top 0.152: v27.09,66.1 27.04,66.66 arc86 26.42,67.2 21.38,67.04 arc-2 21.37,67.04 21.07,67.04 arc-11 21.01,67.04 20.72,67.1 arc-79 20.5,67.37 20.5,68.27 arc77 20.01,68.88 19.73,68.94 arc13 19.57,68.96 19.27,68.96 arc55 18.7,68.67 16.85,66.03 arc-87 15.03,65.66 CON11.3 | R17.2 61.49,35.95 61.41,35.95 arc82 61.08,35.66 60.84,33.87 arc-7 60.83,33.83 60.75,33.52 arc-75 60.51,33.34 59.91,33.34 arc29 59.47,33.23 54.34,30.33 arc-93 53.46,30.6 50.55,36.43 arc46 48.99,37.77 48.99,37.77 arc-3 48.96,37.78 46.08,38.87 arc-2 46.07,38.87 41.78,40.66 arc13 41.56,40.72 41.56,40.72 arc-77 41.3,41.02 41.28,41.27 arc-3 41.28,41.29 41.28,42.28 arc-14 41.29,42.36 41.35,42.6 arc-37 41.44,42.74 41.45,42.75 arc35 41.95,43.5 45.31,54.89 arc67 44.84,56.42 44.4,56.78 arc-20 44.33,56.87 44.27,56.96 arc-30 44.25,57.03 44.25,57.11 IC4.20 44.25,58.46 44.25,58.53 arc-2 44.25,58.57 44.34,61.68 arc54 43.62,63.2 43.53,63.27 arc-22 43.26,63.58 42.59,64.69 arc51 41.82,65.22 30.92,66.83 arc103 30.2,66.14 30.21,66.04 arc-20 30.17,65.67 v29.98,64.97
  Bottom 0.152: v29.98,64.97 28.95,65.36 arc-1 28.93,65.36 v27.09,66.1
71
  Top 0.152: IC9.5 56.32,70.48 56.24,70.48 arc40 56.05,70.42 47.43,63.29 arc-29 46.93,63.06 46.79,63.03 arc69 45.3,61.55 44.77,58.74 arc11 44.75,58.53 44.75,58.46 IC4.19
74  (via drill 0.3 pad 0.61)
  Top 0.152: v33.72,45.2 38.99,45.28 arc-1 39,45.28 39.08,45.28 IC4.47
  Bottom 0.152: 23.47,45.29 24.3,45.22 arc4 24.33,45.22 v33.72,45.2 | SW2.1A 15.92,46.02 16,46.02 21.27,46.02 arc-28 21.57,45.95 22.84,45.26 arc34 23.03,45.22 23.36,45.26 arc22 23.47,45.29 | 23.47,45.29 | SW2.1 23.47,45.63 23.47,45.55 23.47,45.29
75  (via drill 0.3 pad 0.61)
  Top 0.152: v25.66,38.66 31.34,43.82 arc12 31.62,44.13 32.13,44.84 arc29 32.26,45.19 32.28,45.36 arc-21 32.44,45.87 32.92,46.78 arc-217 33.75,45.91 33.45,45.77 arc157 33.75,44.57 39,44.78 39.08,44.78 IC4.48
  Bottom 0.152: SW1.1A 15.92,38.25 16,38.25 23,38.25 23.08,38.25 SW1.1 25.02,38.62 25.1,38.62 arc4 25.12,38.62 v25.66,38.66
+3V3  (via drill 0.3 pad 0.61)
  Top 0.152: v39.77,39.97 33.33,42.05 | v58.48,40.88 arc64 57.76,39.55 57.84,38.37 arc67 58.26,37.81 61.03,36.83 arc20 61.41,36.76 61.66,36.76 arc1 61.68,36.76 61.7,36.76 arc-2 61.72,36.76 61.74,36.76 arc1 61.76,36.76 62.01,36.76 arc-91 62.26,36.51 62.25,36.22 arc3 62.25,36.12 62.27,35.63 62.27,35.62 62.29,34.49 arc-4 62.29,34.47 62.25,33.75 arc5 62.25,33.61 62.25,33.59 arc-36 62.21,33.45 62.02,33.17 arc-46 61.53,32.86 60.66,32.71 arc-10 60.51,32.7 59.91,32.7 arc31 59.78,32.66 54.78,29.64 arc-95 52.73,30.24 49.84,36.07 arc46 48.75,37 48.74,37 arc-3 48.68,37.02 v41.39,39.72 | v33.48,46.49 32.95,45.9 arc54 32.7,44.98 33.33,42.05 | IC2.11 22.77,30.24 22.85,30.24 24.44,30.24 24.52,30.24 C21.2 25.01,30.01 25.01,29.94 arc36 25.07,29.74 28.25,25.38 arc50 28.49,25.25 36.31,24.7 | C28.2 37.97,9.41 38.04,9.41 arc3 38.05,9.41 38.83,9.44 arc-2 38.84,9.44 38.92,9.44 IC7.5 39.76,9.48 39.84,9.48 39.96,9.53 arc83 40.13,9.89 40.04,10.25 arc-40 40.09,10.9 | 40.09,10.9 | 40.09,10.9 arc7 40.1,10.93 v40.56,12.34 | C20.2 59.99,46.11 59.91,46.11 arc55 59.64,45.97 v59.37,45.58 | POWER.4 36.31,24.7 | 36.31,24.7 36.78,25.39 arc35 36.84,25.58 36.84,27.98 arc62 36.67,28.27 34.36,29.51 arc-14 34.3,29.56 31.74,31.91 arc42 31.52,32 29.32,32.01 arc-90 28.99,32.34 28.99,34.21 arc-8 28.99,34.26 29.61,38.6 arc-40 29.72,38.8 33.33,42.05
  Bottom 0.152: v59.37,45.58 58.31,42.9 arc-3 58.3,42.89 58.2,42.68 arc-65 58,42.55 | 58,42.55 57.92,42.55 | 57.92,42.55 IC5.9 57.92,42.55 | v41.39,39.72 v39.77,39.97 | v40.56,12.34 POWER.4 | 57.92,42.55 58,42.55 | 58,42.55 arc-65 58.2,42.42 58.3,42.21 arc-18 58.33,42.12 v58.48,40.88 | D4.A 34.08,53.31 34.08,53.24 arc-5 34.08,53.21 v33.48,46.49
+3V6  (via drill 0.3 pad 0.61)
  Top 0.152: C25.2 28.57,9.41 28.64,9.41 28.65,9.41 29.68,9.44 arc-2 29.7,9.44 29.77,9.44 IC6.5 30.37,9.19 30.37,9.11 arc86 30.68,8.78 37.09,8.38 arc4 37.14,8.37 46.68,8.37 48.73,8.38 arc87 49.47,9.08 49.59,11.75 arc-7 49.6,11.83 49.7,12.4 arc9 49.7,12.5 49.7,13.4 49.7,13.41 49.73,15.86 arc0 49.73,15.88 arc-134 51.55,16.65 55.51,12.8 arc44 55.74,12.71 63.14,12.71 arc90 63.47,13.04 63.47,13.63 arc71 63.24,13.95 60.61,14.86 arc-113 60.17,16.6 62.8,19.47 arc-12 63.05,19.7 67.14,22.59 arc55 67.6,23.49 arc-2 67.6,23.53 67.67,26 arc2 67.67,26.03 67.67,38.73 arc2 67.67,38.76 67.6,41.23 arc-2 67.6,41.27 arc63 67,42.25 65.97,42.77 arc-37 65.46,43.28 64.94,44.3 arc63 63.96,44.91 arc-20 63.46,45 62.85,45.23 arc10 62.67,45.28 62.14,45.37 62.13,45.37 61.66,45.45 arc-7 61.62,45.46 61.34,45.55 arc-68 61.17,45.76 61.14,46.08 arc-5 61.13,46.11 61.13,46.35 arc16 61.11,46.52 61.02,46.83 arc47 60.75,47.15 arc-12 60.66,47.22 60.65,47.22 arc25 60.38,47.35 59.83,47.49 arc-46 59.63,47.64 v59.45,47.94 59.76,48.1 arc-28 59.91,48.14 59.99,48.14 C19.2
  Bottom 0.152: IC5.6 57.92,44.65 58,44.65 arc43 58.15,44.71 58.5,45.04 arc28 58.7,45.34 58.84,45.76 arc-47 59.14,46.09 | 59.14,46.09 | 59.14,46.09 arc79 59.64,47.11 v59.45,47.94
+5V  (via drill 0.3 pad 0.61)
  Top 0.152: 11.45,63.81 16.14,64.68 arc5 16.32,64.72 19.08,65.48 | 11.45,63.81 9.64,65.93 arc-72 9.53,67.52 CON11.2 | 19.08,65.48 23.45,61.17 arc2 23.46,61.17 23.9,60.75 arc-47 24.01,60.51 24.01,60.43 R5.2 24.25,59.99 24.25,59.91 arc8 24.25,59.87 24.28,59.65 arc10 24.36,59.31 24.78,58.02 arc26 24.92,57.77 25.15,57.54 arc-44 25.23,57.35 25.23,56.78 arc15 25.25,56.61 25.33,56.3 arc75 25.85,55.91 26.45,55.91 arc53 26.88,56.12 27.04,56.34 arc35 27.19,56.75 27.23,58.15 arc20 27.14,58.79 26.81,59.81 arc-18 26.79,59.91 26.79,59.99 R6.2 27.04,60.21 27.12,60.21 27.13,60.21 32.48,60.1 arc-18 32.82,60.05 35.1,59.27 arc-71 35.32,58.96 35.32,58.36 arc-79 35.06,58.04 33.9,57.81 | 54.9,57.18 55.08,57.12 arc61 55.71,57.27 58.07,59.57 arc11 58.3,59.84 58.37,59.94 arc-55 58.64,60.08 58.72,60.08 R22.1 | 35.19,54.92 34.74,53.88 | 33.9,57.81 33.8,57.61 arc27 33.76,57.46 33.76,56.86 arc38 33.83,56.66 35.19,54.92 | v48.19,35.25 51.81,24.93 arc-19 51.83,24.83 51.83,24.76 R25.1 51.83,24.01 51.83,23.93 arc-31 51.78,23.78 47.33,16.44 arc33 47.17,15.83 47.4,9.8 arc88 47.73,9.48 47.81,9.48 IC3.5 47.81,9.44 47.73,9.44 arc2 47.72,9.44 46.69,9.41 46.68,9.41 46.6,9.41 C22.2 45.85,9.41 45.78,9.41 44.39,9.41 44.32,9.41 C29.2 43.57,9.41 43.49,9.41 43.48,9.41 42.45,9.44 arc2 42.44,9.44 42.36,9.44 IC7.1 41.52,9.48 41.44,9.48 arc-37 41.24,9.55 40.59,10.03 arc-118 40.69,11.03 41.3,11.31 arc-25 41.44,11.34 41.52,11.34 IC7.3 42.06,11.64 42.06,11.71 42.06,12.26 arc2 42.06,12.28 42.02,13.67 arc71 41.79,13.97 40.2,14.48 arc-72 39.17,15.88 arc149 37.18,16.44 36.49,15.31 arc-59 35.56,14.78 33.02,14.78 arc-12 32.8,14.81 21.4,17.18 arc-17 21.2,17.25 20.51,17.63 arc-22 20.21,17.88 20.2,17.89 arc78 18.92,18.15 18.72,18.04 arc-25 18.1,17.88 9.46,17.57 arc-2 9.45,17.57 8.15,17.57 arc-90 7.82,17.9 7.74,28.03 arc7 7.71,28.51 7.42,30.6 arc-8 7.41,30.7 7.41,31.9 arc-5 7.42,31.96 7.73,35.69 9.63,58.55 arc-15 9.72,58.94 11.45,63.81
  Top 0.152: R24.2 29.73,46.09 29.73,46.17 arc38 29.67,46.35 26.71,50.18 arc5 26.69,50.2 25.61,51.4 arc-42 25.52,51.62 25.52,52.19 25.52,52.52 arc-83 25.81,52.85 34.74,53.88 | C31.1 59.99,44.13 59.91,44.13 59.37,44.13 arc-43 58.39,44.51 57.55,45.28 arc8 57.39,45.41 57.16,45.58 arc35 56.5,45.78 56.43,45.78 IC4.80 55.08,45.78 55,45.78 arc-1 54.98,45.78 54.05,45.8 arc-35 53.69,45.93 52.32,46.92 arc-24 51.81,47.48 51.37,48.23 arc-45 51.17,49.63 52.57,55.11 arc-52 53.17,55.8 53.69,56.03 arc11 53.87,56.13 54.12,56.3 arc17 54.3,56.48 54.31,56.48 arc-1 54.32,56.5 54.9,57.18 | v49.18,38.37 47.6,38.86 arc-30 47.45,38.95 47.04,39.4 arc47 46.79,39.5 46.72,39.5 C30.1 46.49,40 46.49,40.07 arc-16 46.51,40.16 46.75,40.99 arc16 46.75,41.03 46.75,41.11 IC4.61 46.75,42.46 46.75,42.53 arc-1 46.75,42.55 46.77,43.12 arc-9 46.77,43.21 49.25,57.01 arc10 49.25,57.03 49.25,57.11 IC4.10 49.25,58.46 49.25,58.53 arc-30 49.27,58.6 49.33,58.7 arc-17 49.39,58.78 49.93,59.27 arc47 50.03,59.49 50.03,59.57 C5.1 50.25,60.06 50.33,60.06 arc18 50.43,60.08 55.6,61.77 arc-15 55.87,61.82 56,61.83 arc10 56.38,61.88 56.56,61.92 arc-156 57.39,60.06 54.9,58.24 arc93 54.78,57.33 54.9,57.18 | IC4.31 39.08,53.28 39,53.28 arc30 38.93,53.27 37.9,52.67 arc-30 37.53,52.57 36.63,52.57 arc-19 36.4,52.61 35.66,52.86 arc-34 35.35,53.08 34.74,53.88 | R4.2 19.57,67.44 19.57,67.37 arc-15 19.56,67.29 19.08,65.48 | R2.1 29.58,58.66 29.66,58.66 arc19 29.76,58.68 31.44,59.27 arc-19 31.55,59.29 32.45,59.29 arc-49 32.7,59.18 33.9,57.81 | C3.1 36.71,55.11 36.63,55.11 arc7 36.59,55.1 35.19,54.92
  Bottom 0.152: v49.18,38.37 v48.19,35.25
  pour Top: 41.02,56.52 54.36,56.52 54.36,43.31 41.02,43.31
+5VP
  Top 0.152: 36.59,9.41 36.85,8.95 arc60 37.14,8.78 46.68,8.78 48.73,8.78 arc87 49.06,9.1 49.19,11.77 arc-13 49.23,12.02 49.34,12.43 arc16 49.35,12.5 49.35,13.4 49.35,13.41 49.34,15.86 arc-28 49.5,16.55 53.29,23.8 arc28 53.33,23.93 53.33,24.01 R25.2 53.33,24.76 53.33,24.83 arc-52 53.44,25.07 53.57,25.17 | 45.94,21.97 42.81,22.01 42.73,22.01 C2.1 41.09,22.48 41.01,22.48 40.02,22.48 39.94,22.48 C11.1 | R27.1 59.77,23.04 59.69,23.04 arc-20 59.58,23.06 53.74,25.14 arc15 53.66,25.16 53.57,25.17 | Y2.+ 13.04,55.45 13.04,55.37 13.04,33.65 arc15 13.05,33.58 17.05,19.05 arc102 18.52,18.4 18.75,18.52 arc-78 20.52,18.14 20.52,18.14 arc22 20.71,17.98 21.39,17.61 arc29 21.55,17.57 22.85,17.57 22.86,17.57 33.73,17.84 | 36.59,9.41 34.99,9.41 34.92,9.41 C26.2 34.17,9.41 34.09,9.41 arc-3 34.08,9.41 33.31,9.44 arc2 33.3,9.44 33.22,9.44 IC6.1 | IC6.3 33.22,11.38 33.3,11.38 arc12 33.37,11.39 34.02,11.53 arc-10 34.08,11.54 36.56,11.64 arc-7 36.64,11.64 38.07,11.54 arc-86 38.37,11.21 38.37,10.61 arc-76 38.12,10.29 37.06,10.03 arc46 36.85,9.87 36.59,9.41 | 45.94,21.97 45.92,21.9 arc106 46.24,21.48 46.31,21.48 C15.+ 46.57,18.88 46.57,18.81 arc-51 46.45,18.55 POWER.5 41.09,14.9 arc-115 39.56,15.88 arc125 37.26,17.07 POWER.2 33.73,17.84 | L1.2 33.73,19.85 33.73,19.78 33.73,17.84 | C10.1 38.85,37.73 38.85,37.65 38.85,36.52 38.85,36.44 R12.2 39.07,35.95 39.15,35.95 arc-2 39.16,35.95 47.43,35.63 | 47.43,35.63 47.96,35.84 arc-86 48.76,35.52 53.57,25.17 | 47.43,35.63 47.52,35.45 arc-30 47.56,35.28 | 47.56,35.28 | 47.56,35.28 arc4 47.56,35.24 47.57,34.97 47.57,23.41 arc-52 47.44,23.14 46.03,22.07 arc11 45.99,22.02 45.94,21.97
  pour Top: 36.45,22.23 37.59,23.37 43.69,23.37 45.34,21.72 47.24,21.72 47.24,18.92 37.34,18.92 36.45,19.81
+5VP_O
  Top 0.152: R27.2 62.66,22.32 62.74,22.32 63.96,22.32 arc27 64.5,22.45 CON2.5 CON2.8 CON2.11 CON2.14 CON2.17 CON2.20 CON2.23 CON2.26 | CON2.50 CON2.47 CON2.44 | CON2.41 CON2.38 | CON2.35 CON2.32 CON2.29
  Bottom 0.152: CON2.44 CON2.41 | CON2.38 CON2.35 | CON2.29 CON2.26
ADC0  (via drill 0.3 pad 0.61)
  Top 0.152: IC4.89 55.08,50.28 55,50.28 arc31 54.67,50.19 v52.97,49.17
  Bottom 0.152: v52.97,49.17 52.8,48.6 arc19 52.78,48.39 52.88,46.03 arc-9 52.88,45.93 51.22,30.11 arc24 51.27,29.67 CON1.1
ADC1  (via drill 0.3 pad 0.61)
  Top 0.152: IC4.88 55.08,49.78 55,49.78 arc30 54.93,49.77 54.84,49.71 arc12 54.78,49.67 v53.41,48.42
  Bottom 0.152: v53.41,48.42 53.28,45.95 arc-3 53.28,45.89 51.62,30.07 arc32 51.68,29.72 CON1.2
ADC2  (via drill 0.3 pad 0.61)
  Top 0.152: v60.94,53.44 arc4 61.06,53.46 61.27,53.5 arc-11 61.41,53.51 62.01,53.51 arc-26 62.33,53.44 64.44,52.42 arc-64 65.06,51.43 arc90 66.5,49.99 arc-90 67.6,48.89 arc3 67.6,48.83 67.94,41.33 arc-3 67.94,41.27 arc63 68.55,40.29 69.56,39.77 arc-63 70.21,38.73 70.21,26.03 arc-63 69.56,24.99 68.55,24.47 arc63 67.94,23.49 arc-54 67.35,22.33 63.27,19.35 arc21 62.97,19.04 CON1.3 | IC4.87 56.43,49.28 56.5,49.28 arc30 56.57,49.3 56.67,49.36 arc36 56.8,49.51 v57.11,50.19
  Bottom 0.152: v57.11,50.19 58.22,51.78 arc-25 58.42,51.97 v60.94,53.44
ADC3
  Top 0.152: IC4.86 55.08,48.78 55,48.78 arc5 54.94,48.78 54.9,48.78 arc51 54.05,48.27 53.92,48.08 arc-115 52.88,48.1 52.43,48.84 arc-49 52.36,49.36 53.84,54.11 arc-30 54.01,54.38 | 54.01,54.38 | 54.01,54.38 arc34 54.2,54.71 54.28,55.09 arc-2 54.29,55.11 54.34,55.32 arc-19 54.44,55.52 54.8,56.06 arc-43 54.95,56.16 55.61,56.32 arc28 56.24,56.65 58.42,58.61 arc-5 58.44,58.62 58.82,58.91 arc-19 59.03,59.02 59.43,59.15 arc72 59.87,59.75 59.87,60.32 59.87,60.65 arc-91 60.15,60.92 | 60.15,60.92 | 60.15,60.92 arc35 60.88,61.13 60.93,61.17 arc-57 61.47,61.22 62.67,60.72 arc-82 63.01,60.02 62.84,59.34 arc78 63.43,58.02 64.46,57.49 arc-63 65.06,56.51 arc4 65.06,56.41 65.4,51.53 arc-4 65.4,51.43 arc90 66.5,50.33 arc-90 67.94,48.89 arc63 68.55,47.91 69.56,47.39 arc-60 70.21,46.41 70.61,38.81 arc-3 70.61,38.73 70.61,26.03 arc-9 70.59,25.78 70.19,23.3 arc-22 70.04,22.89 67.81,19.15 arc31 67.6,18.41 arc-10 67.58,18.21 67.11,15.68 arc-105 65.57,14.89 CON1.4
ADC4  (via drill 0.3 pad 0.61)
  Top 0.152: v55.27,57.73 57.71,59.79 arc23 58.08,60.26 58.34,60.8 arc-38 58.5,60.95 59.73,61.52 arc-26 60.16,61.61 arc36 60.5,61.72 60.52,61.73 arc-19 60.91,61.91 63.65,62.69 arc-17 63.98,62.73 66.52,62.69 arc-89 67.6,61.59 arc90 69.04,60.15 arc-86 70.14,59.13 71.02,46.49 arc-1 71.02,46.46 71.42,38.86 arc-3 71.43,38.73 71.43,26.03 arc-9 71.4,25.65 70.19,18.22 arc-3 70.18,18.17 69.65,15.65 arc-69 68.75,14.8 66.28,14.4 arc-19 65.78,14.4 63.32,14.83 arc-195 63.94,16.84 CON1.5 | IC4.85 55.08,48.28 55,48.28 arc41 54.58,48.13 54.33,47.91 arc10 54.21,47.78 | 54.21,47.78 | 54.21,47.78 arc-110 52.54,47.88 52.08,48.62 arc-48 51.97,49.47 v53.58,54.85
  Bottom 0.152: v53.58,54.85 v55.27,57.73
ADC5
  Top 0.152: IC4.84 55.08,47.78 55,47.78 arc20 54.95,47.78 54.79,47.72 arc31 54.53,47.53 arc-110 52.19,47.67 51.74,48.41 arc-46 51.57,49.53 52.97,55.01 arc-50 53.31,55.42 53.77,55.65 arc9 53.98,55.76 54.07,55.83 arc9 54.26,55.98 54.45,56.16 arc8 54.55,56.27 54.56,56.28 arc-31 54.81,56.46 55.62,56.75 arc22 55.97,56.95 58.15,58.91 arc-7 58.22,58.97 58.63,59.25 arc-22 59,59.41 59.3,59.48 arc77 59.52,59.75 59.52,60.32 arc-1 59.52,60.33 59.52,60.66 arc-90 60.15,61.27 | 60.15,61.27 | 60.15,61.27 arc35 60.69,61.43 60.73,61.45 arc-57 61.6,61.55 62.8,61.05 arc-25 63.14,60.82 arc21 63.48,60.57 64.46,60.1 arc-58 65.12,59.17 65.39,56.66 arc-6 65.4,56.51 arc63 66,55.53 67.03,55.01 arc-59 67.67,54.06 67.88,51.34 arc63 68.58,50.35 69.5,49.97 arc-58 70.19,49.08 70.59,46.6 arc-6 70.61,46.43 71.02,38.84 arc-3 71.02,38.73 71.02,26.03 arc-9 71,25.71 70.59,23.24 arc-23 70.38,22.66 68.1,18.99 arc47 67.98,18.12 CON1.6
ADC6
  Top 0.152: CON2.27 62.56,42.85 62.43,42.99 arc48 62.01,43.18 61.76,43.18 61.75,43.18 61.72,43.18 arc-1 61.7,43.18 61.67,43.18 61.41,43.18 arc-79 60.86,43.64 60.8,43.96 arc-11 60.78,44.08 60.78,44.32 arc5 60.78,44.34 60.75,44.67 arc68 60.58,44.88 60.3,44.96 arc36 60.1,44.96 59.83,44.87 arc11 59.79,44.85 | 59.79,44.85 | 59.79,44.85 arc-71 58.81,44.95 57.81,45.82 arc-1 57.79,45.84 57.55,46.06 arc14 57.24,46.29 57.03,46.4 arc29 56.5,46.53 55,46.53 arc-55 54.8,46.64 54.73,46.73 arc-95 54.84,47.21 54.93,47.27 arc-30 55,47.28 55.08,47.28 IC4.83
ADC7
  Top 0.152: CON2.24 65,40.73 arc94 64.42,42.34 63.5,42.74 arc-11 63.3,42.85 62.66,43.3 arc35 62.01,43.5 61.76,43.5 arc1 61.74,43.5 61.72,43.5 arc-2 61.7,43.5 61.68,43.5 arc1 61.67,43.5 61.41,43.5 arc-84 61.17,43.72 61.14,44.05 arc-5 61.13,44.08 61.13,44.32 arc11 61.12,44.43 61.06,44.75 arc48 60.8,45.13 60.58,45.26 arc73 59.73,45.18 59.73,45.18 arc-84 59.01,45.18 57.74,46.31 arc42 56.5,46.78 56.43,46.78 IC4.82
ADC8  (via drill 0.3 pad 0.61)
  Top 0.152: v62.44,60.17 60.97,55.11 arc-67 60.77,54.94 arc4 60.66,54.92 59.8,54.76 arc-2 59.77,54.75 56.59,54.29 arc-8 56.5,54.28 56.43,54.28 IC4.97
  Bottom 0.152: CON2.51 v62.44,60.17
ADC9  (via drill 0.3 pad 0.61)
  Top 0.152: v63,57.54 61.21,54.86 arc-50 60.8,54.62 arc7 60.66,54.59 59.91,54.41 arc-3 59.87,54.4 56.71,53.8 arc-11 56.5,53.78 56.43,53.78 IC4.96
  Bottom 0.152: CON2.48 v63,57.54
ADC10
  Top 0.152: CON2.45 61.27,54.47 arc-31 60.84,54.3 arc11 60.68,54.27 60.08,54.08 arc-4 59.98,54.05 56.76,53.31 arc-13 56.5,53.28 56.43,53.28 IC4.95
ADC11
  Top 0.152: CON2.42 60.94,53.99 arc22 60.73,53.95 60.32,53.78 arc-7 60.13,53.72 56.8,52.82 arc-15 56.5,52.78 56.43,52.78 IC4.94
ADC12
  Top 0.152: CON2.39 62.23,53.02 arc45 61.99,53.1 61.7,53.09 arc9 61.65,53.08 61.36,53.02 arc14 61.3,53 61.18,52.95 arc-59 60.64,52.98 | 60.64,52.98 | 60.64,52.98 arc16 60.58,53.01 60.3,53.09 arc17 60.21,53.1 59.91,53.1 arc14 59.83,53.09 56.78,52.32 arc-14 56.5,52.28 56.43,52.28 IC4.93
ADC13
  Top 0.152: CON2.36 62.77,50.6 arc-15 62.59,50.94 62.59,50.95 arc46 62.26,51.3 62.01,51.41 arc24 61.71,51.48 60.21,51.48 arc2 60.18,51.48 59.88,51.47 arc53 59.31,51.15 59.26,51.07 arc-108 58.24,51.04 58.24,51.05 arc37 57.48,51.56 56.8,51.74 arc15 56.5,51.78 56.43,51.78 IC4.92
ADC14
  Top 0.152: CON2.33 62.92,48.35 arc-13 62.83,48.6 62.27,50.81 arc64 62.06,51.01 61.78,51.06 arc12 61.71,51.07 60.21,51.07 60.2,51.07 59.9,51.07 arc53 59.65,50.93 59.56,50.82 arc-107 57.93,50.8 57.92,50.81 arc46 57.23,51.2 56.58,51.28 arc7 56.5,51.28 56.43,51.28 IC4.91
ADC15
  Top 0.152: CON2.30 62.91,44.75 arc33 62.59,44.9 61.6,45.05 arc-27 61.28,45.18 61.09,45.32 arc-44 60.86,45.67 60.8,45.99 arc-11 60.78,46.11 60.78,46.35 arc8 60.78,46.39 60.74,46.71 arc62 60.59,46.89 60.32,46.99 arc20 60.21,47.01 59.91,47.01 arc45 59.68,46.91 59.22,46.46 arc-120 58.16,46.75 57.69,48.51 arc-18 57.66,48.83 57.73,50.16 arc96 57.08,50.81 56.51,50.78 56.5,50.78 56.43,50.78 IC4.90
AREF  (via drill 0.3 pad 0.61)
  Top 0.152: v61.25,60.69 61.06,59.69 arc-36 60.97,59.51 60.19,58.76 arc-11 59.98,58.6 | 59.98,58.6 | 59.98,58.6 arc41 59.87,58.44 59.56,57.37 arc-11 59.53,57.31 58.97,56.21 arc27 58.94,56.08 58.94,56 C6.1 58.72,55.51 58.64,55.51 arc19 58.53,55.49 56.55,54.79 arc-19 56.5,54.78 56.43,54.78 IC4.98 | JP6.3 29.39,65.21 arc-26 29.55,65.44 29.6,65.48 arc52 29.8,66 29.79,66.12 arc-86 30.68,67.23 56.21,71.03 arc-12 56.26,71.03 56.35,71.02 arc6 56.47,71.02 56.56,71.03 arc-3 56.57,71.03 58.11,71.03 arc-3 58.13,71.03 58.22,71.02 arc6 58.33,71.02 58.43,71.03 arc-77 58.68,70.86 58.76,70.58 arc-17 58.77,70.48 58.77,70.19 arc-90 58.45,69.86 56.24,69.84 arc47 56,69.74 55.7,69.41 arc24 55.55,69.15 55.16,68.01 arc19 55.1,67.64 55.1,66.38 arc90 56.24,65.23 56.57,65.23 arc4 56.65,65.23 57.23,65.28 arc7 57.36,65.29 58.16,65.45 arc-16 58.53,65.47 61.35,65.24 arc4 61.43,65.23 63.52,65.2 arc-169 63.7,63.09 63.68,63.09 arc1 63.65,63.08 60.87,62.5 arc24 v60.17,62.19 | v60.17,62.19
  Bottom 0.152: v60.17,62.19 v61.25,60.69
AVCC
  Top 0.152: R22.2 60.44,59.82 60.44,59.75 arc-38 60.38,59.56 60.03,59.12 arc-32 59.58,58.8 59.14,58.65 arc71 58.94,58.36 58.94,58.29 C4.1 58.72,57.79 58.64,57.79 arc36 58.45,57.73 56.31,56.19 arc54 56.17,55.92 56.17,55.85 IC4.100
DTR  (via drill 0.3 pad 0.61)
  Top 0.152: v19.4,17.23 18.35,17.09 arc-6 18.13,17.07 9.49,16.76 arc-2 9.45,16.76 8.15,16.76 arc-90 7.01,17.89 6.93,28.02 arc7 6.9,28.4 6.62,30.49 arc-8 6.6,30.7 6.6,31.9 arc-5 6.61,32.03 6.92,35.75 arc2 6.93,35.85 8.51,66.91 arc-6 8.54,67.15 8.94,69.62 arc-80 10.63,71.09 19.85,71.29 arc-1 19.87,71.29 21.37,71.29 arc-4 21.42,71.29 27.51,70.88 arc-43 27.73,70.78 28.15,70.33 arc47 28.39,70.22 28.47,70.22 R7.1 28.69,69.73 28.69,69.65 28.69,68.27 28.69,68.19 C7.1 | IC2.33 16.17,33.73 16.17,33.65 arc5 16.17,33.62 17.42,19.27 arc127 18.48,18.86 v18.92,19.26
  Bottom 0.152: v18.92,19.26 v19.4,17.23
GND  (via drill 0.3 pad 0.61)
  Top 0.152: v36.22,54.18 36.36,53.8 arc59 36.58,53.62 36.63,53.61 36.71,53.61 C3.2 | C28.1 37.22,10.91 37.14,10.91 arc-11 37.09,10.91 v36.59,11.01 35.01,10.91 arc-4 34.99,10.91 34.92,10.91 C26.1 34.17,10.91 34.09,10.91 arc40 33.9,10.84 33.51,10.51 arc-40 33.3,10.43 33.22,10.43 IC6.2 32.37,10.43 32.3,10.43 arc-90 31.97,10.76 31.97,11.71 arc-16 31.98,11.81 32.23,12.67 arc16 32.25,12.76 32.25,12.83 C24.1 32.02,13.09 31.95,13.09 arc47 31.7,12.98 31.29,12.53 arc-32 31.13,12.44 29.61,12.03 arc11 29.55,12.01 28.5,11.51 arc64 28.31,11.21 28.31,11.13 C25.1 | v21.01,31.69 21.47,31.58 arc13 21.55,31.57 21.63,31.57 IC2.12 | IC1.1 36.39,29.88 36.39,29.8 arc75 36.63,29.48 v37.44,29.26 38.12,29.06 arc17 38.22,29.04 38.29,29.04 C8.2 | v18.83,33.11 18.68,33.54 arc-19 18.66,33.65 18.66,33.73 IC2.29 | C33.2 65.92,67.86 65.92,67.78 arc-92 65.58,67.45 v65.03,67.47 63.68,67.32 arc-6 63.65,67.31 61.44,67.31 arc12 61.38,67.3 58.51,66.68 arc-12 58.44,66.67 58.37,66.67 IC9.8 | v54.06,46.44 54.89,46.29 arc10 55,46.28 55.08,46.28 IC4.81 | v60.99,47.63 61.1,47.93 arc-69 61.41,48.14 61.49,48.14 C19.1 | v21.27,45.39 21.27,45.95 21.27,46.03 T1.2 | C32.2 65.67,12.66 65.67,12.73 arc19 65.65,12.84 v65.5,13.27 | IC8.8 57.86,9.53 57.94,9.53 arc16 58.02,9.54 v58.48,9.67 | IC2.1 21.63,18.37 21.55,18.37 arc-19 21.44,18.39 v21.01,18.54 | IC2.28 12.46,33.73 12.46,33.65 arc5 12.46,33.62 v12.51,33.09 | C31.2 61.93,44.3 62.01,44.3 v62.5,44.3 | C30.2 48.22,39.74 48.29,39.74 arc19 48.4,39.76 v48.83,39.91 | C22.1 45.85,10.91 45.78,10.91 44.39,10.91 44.32,10.91 C29.1 43.57,10.91 43.49,10.91 arc28 43.35,10.88 42.59,10.47 arc-28 42.44,10.43 42.36,10.43 IC7.2 41.52,10.43 41.44,10.43 arc-8 41.4,10.44 v40.94,10.5